# Altium PCB LXF1768.PcbDoc (part 2 of 5)
Units mil, origin at the board's own origin, x right, y up, seen from the top; angles counter-clockwise.
Board outline 3899 x 3079 mil, 2 copper layers (Top Layer, Bottom Layer); 52 components, 108 nets, 388 pads, 52 vias.
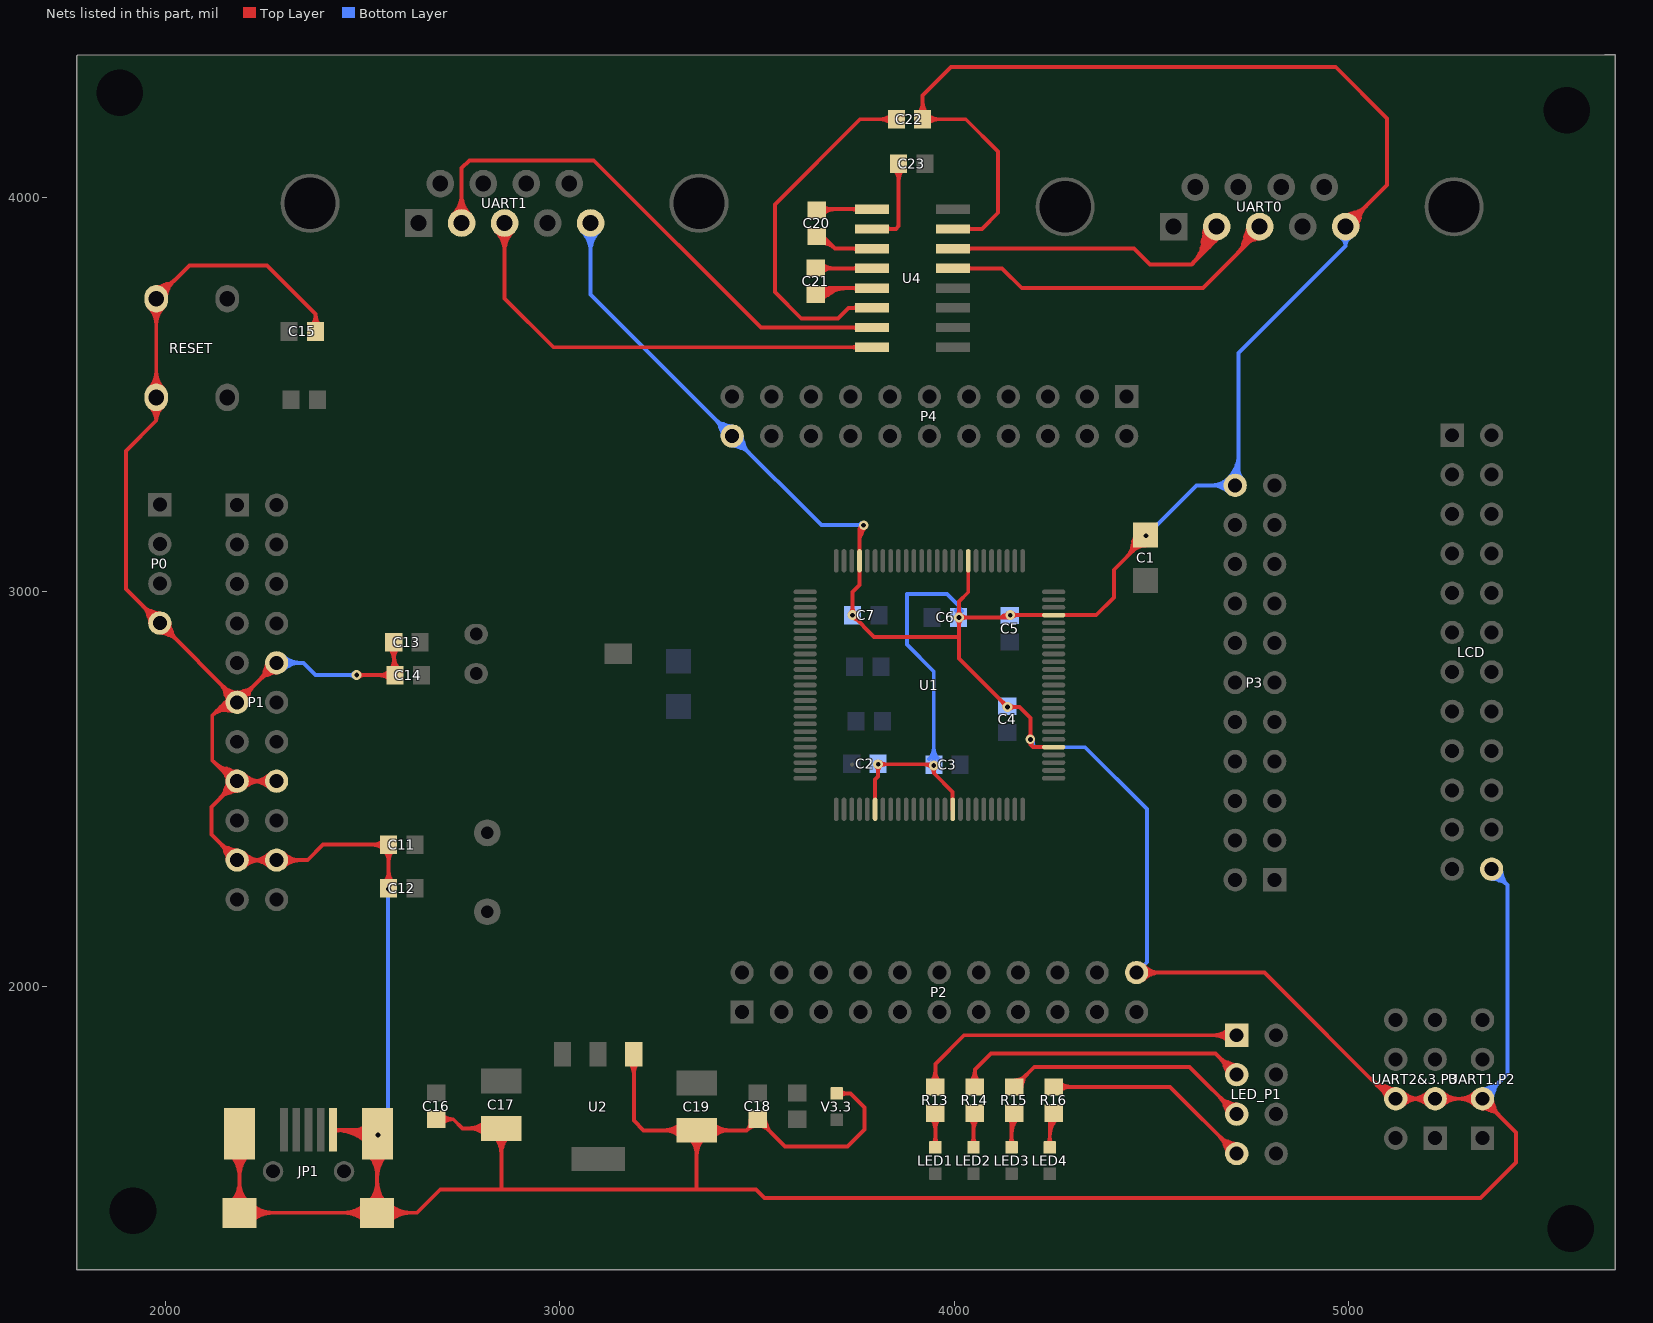
[diagram p2: the nets of this part, all layers, seen from the top]

## Via types
v1: diameter 25, hole 12, Top Layer to Bottom Layer, 27 vias
v2: diameter 24, hole 12, Top Layer to Bottom Layer, 25 vias

## Nets (pads, with @x,y where several pads share a name; then routed paths per layer and width w, separated by ;. In a path a pad name is that pad's centre, name@x,y a point inside that pad or via, vN(x,y) a via of type N, cw(c..) or ccw(c..) an arc to the next point about the centre after c; other vN are vias at no path point) (continued)
DGND: C1.2 C2.2 C3.2 C4.2 C5.2 C6.2 C7.2 C11.1 C12.1 C13.1 C14.1 C15.2 C16.2 C17.2 C18.2 C19.2 C22.2 JP1.5 JP1.6 JP1.7 JP1.8 JP1.9 LCD.24 P0.4 P1.10 P1.11 P1.15 P1.16 P1.19 P1.20 P2.22 P3.22 P4.22 pad.EndPad@4992,3926 pad.StartPad@3759.8,3078.74 RESET.2 U1.31 U1.41 U1.55 U1.72 U1.83 U1.97 U2.1 U4.15 UART0.5 UART1.5 UART1.P2.2 UART2&3.P3.3 UART2&3.P3.4 V3.3.2 | length 41208.9
  Top Layer w10: 1955.48,2943.35 ccw(c1992.61,2953.3) P0.4@1984.9,2915.64 ; 1963.65,2951.52 cw(c1953.7,2914.39) P0.4@1991.36,2922.1 ; RESET.2@1972.18,3749.33 cw(c2014.35,3737.73) 2003.03,3779.98 ; RESET.2@1977.64,3743.04 ccw(c1973.08,3778.61) 2007.72,3769.33 ; P0.4@1980.64,2919.9 ccw(c2018.3,2927.61) 2008.35,2890.48 ; RESET.2@1981.99,3747.77 cw(c2004.92,3746.72) 1998.98,3768.89 ; P0.4@1987.1,2926.36 cw(c1979.39,2888.7) 2016.52,2898.65 ; 2136.96,2556.6 cw(c2121.61,2499.3) P1.15@2177.72,2518.53 ; 2148.8,2700.71 ccw(c2152.36,2726.22) P1.11@2177.57,2720.93 ; 2150.87,2744.63 ccw(c2191.84,2755.6) P1.11@2180.54,2714.73 ; 2151.48,2342.35 ccw(c2188.61,2352.3) P1.19@2180.9,2314.64 ; 2151.48,2497.65 cw(c2188.61,2487.7) P1.15@2180.9,2525.36 ; 2152.71,2537.79 ccw(c2183.05,2545.92) P1.15@2181.78,2514.53 ; 2155.09,2551.74 cw(c2143.01,2506.64) P1.15@2187.18,2521.77 ; 2158.33,2540.87 cw(c2151.54,2515.5) P1.15@2177.52,2519.34 ; 2159.4,2699.23 ccw(c2162.86,2724.02) P1.11@2187.36,2718.88 ; 2159.65,2350.52 cw(c2149.7,2313.39) P1.19@2187.36,2321.1 ; 2159.65,2489.48 ccw(c2149.7,2526.61) P1.15@2187.36,2518.9 ; 2161.93,2749.9 cw(c2152.93,2716.32) P1.11@2187.43,2720.69 ; P1.11@2176.64,2721.1 cw(c2214.3,2713.39) 2204.35,2750.52 ; P1.11@2183.1,2714.64 ccw(c2175.39,2752.3) 2212.52,2742.35 ; JP1.6@2188,1626 JP1.8@2188,1426 JP1.9@2537,1426 ; 2251.48,2797.65 cw(c2288.61,2787.7) P1.10@2280.9,2825.36 ; 2259.65,2789.48 ccw(c2249.7,2826.61) P1.10@2287.36,2818.9 ; P1.16@2282,2520 P1.15@2182,2520 P1.15@2177,2515 ; P1.10@2282,2820 P1.11@2182,2720 ; C15.2@2380.93,3660 2380.93,3704.07 2258,3827 2061,3827 RESET.2@1977,3743 RESET.2@1977,3493 1977,3434 ; JP1.5@2425,1636 JP1.7@2526,1636 ; v1(2485,2789) C14.1@2582,2789 ; JP1.7@2537,1623 JP1.9@2537,1426 ; C12.1@2566,2249 C11.1@2566,2359 2400,2359 2361,2320 P1.20@2282,2320 P1.19@2182,2320 2117,2385 2117,2455 P1.15@2177,2515 ; C14.1@2579,2792 C13.1@2579,2872 ; C16.2@2687,1663.07 2729.93,1663.07 2753,1640 C17.2@2852,1640 2852,1489 ; U2.1@3187.55,1827.87 3187.55,1659.45 3212,1635 C19.2@3347,1635 ; 3347,1486 C19.2@3347,1635 ; C18.2@3504.77,1666.32 cw(c3498.06,1639.15) C18.2@3525.09,1646.4 ; V3.3.2@3703,1728.46 3736.54,1728.46 3772,1693 3772,1637 3729,1594 3571.07,1594 C18.2@3502,1663.07 3473.93,1635 ; v1@3742.06,2933.5 cw(c3742.2,2915.88) 3754.81,2928.19 ; v1@3742.19,2933.5 cw(c3742.61,2916.88) 3754.51,2928.5 cw(c3766.12,2940.39) v1@3749.5,2940.81 ; v1@3749.5,2940.94 ccw(c3767.12,2940.8) 3754.81,2928.19 ; 3759.9,3157.3 cw(c3768.21,3152.5) v2@3769.24,3162.04 ; 3763.51,3144.24 ccw(c3744.43,3155.25) v2@3763.83,3165.68 ; v2(3770,3169) 3759.8,3158.8 ; U1.31@3799.16,2448.82 3799.16,2524.16 3807,2532 v1(3807,2563) 3945,2563 v1(3948,2560) 3948,2541 3996.01,2492.99 U1.41@3996.01,2448.82 ; U4.15@3996.36,3920 4070,3920 4111,3961 4111,4116 4029,4198 C22.2@3919.93,4198 3919.93,4257.93 3992,4330 4967,4330 5097,4200 5097,4031 UART0.5@4992,3926 ; U1.83@4035.39,3078.74 4035.39,2999 4012,2975.61 v1(4012,2935) ; 4123.02,2938.41 cw(c4128.29,2929.28) v1@4136.3,2936.13 ; v1@4127.5,2708.06 ccw(c4109.88,2708.2) 4122.19,2720.81 ; v1@4127.5,2708.19 ccw(c4110.88,2708.61) 4122.5,2720.51 ccw(c4134.39,2732.12) v1@4134.81,2715.5 ; v1@4134.94,2715.5 cw(c4134.8,2733.12) 4122.19,2720.81 ; U1.55@4251.92,2606.3 4199.7,2606.3 ; 4449.93,3112 cw(c4498.94,3098.87) C1.2@4483.97,3147.35 ; 4452.59,3127.43 cw(c4472.95,3110.89) C1.2@4483.1,3135.08 ; C1.2@4454.62,3129.49 cw(c4492.63,3119.3) C1.2@4481.01,3156.9 ; C1.2@4461.01,3137.79 cw(c4478.34,3123.72) C1.2@4486.97,3144.31 ; 4461.19,3111.12 ccw(c4451.61,3146.88) C1.2@4488.49,3143.7 ; P2.22@4462,2035 4786,2035 5106,1715 UART2&3.P3.4@5119,1715 UART2&3.P3.3@5219,1715 UART1.P2.2@5339,1715 5424,1630 5424,1553 5334,1463 3519,1463 3497,1485 2697,1485 2638,1426 JP1.9@2537,1426 ; C1.2@4464.02,3134.8 cw(c4473.74,3119.34) C1.2@4482.43,3135.4 ; C1.2@4469.43,3148.16 cw(c4483.72,3136.55) C1.2@4490.83,3153.53 ; C1.2@4480.68,3136.71 cw(c4474.55,3130.62) C1.2@4482.68,3127.67 ; C1.2@4482.93,3128.38 cw(c4494.3,3124.26) C1.2@4489.18,3135.21 ; C1.2@4485,3144 4485,3136 4405,3056 4405,2986 4359.94,2940.95 U1.72@4251.92,2940.95 4251.86,2941 v1(4142,2941) 4136,2935 v1(4012,2935) ; UART0.5@4982.2,3928.01 cw(c5025.64,3919.11) 5014.16,3961.94 ; UART0.5@4994.01,3916.2 ccw(c4985.11,3959.64) 5027.94,3948.16 ; 5029.8,3966.13 ccw(c5043.37,3915.48) UART0.5@4992,3926 ; 5032.13,3963.8 cw(c4981.48,3977.37) UART0.5@4992,3926 ; 5071.84,1752.16 cw(c5055.4,1690.81) UART2&3.P3.4@5114.77,1713.39 ; 5090.07,1731.42 ccw(c5118.61,1739.06) UART2&3.P3.4@5119.09,1709.53 ; 5090.72,1747.1 cw(c5077.94,1699.38) UART2&3.P3.4@5124.12,1716.95 ; 5093.59,1736.34 cw(c5086.06,1708.22) UART2&3.P3.4@5114.57,1714.09 ; UART1.P2.2@5333.64,1713.9 ccw(c5371.3,1721.61) 5361.35,1684.48 ; UART1.P2.2@5340.1,1720.36 cw(c5332.39,1682.7) 5369.52,1692.65 ; 1944.13,2962.87 cw(c1902.26,2921) 1961.47,2921 ccw(c1902.26,2921) 1944.13,2962.87 ; 1944.13,2962.87 ccw(c1986,3004.74) 1986,2945.53 cw(c1986,3004.74) 1944.13,2962.87 ; 1961.2,2945.8 cw(c1936.4,2921) 1971.47,2921 ccw(c1936.4,2921) 1961.2,2945.8 ; 1961.2,2945.8 ccw(c1986,2970.6) 1986,2935.53 cw(c1986,2970.6) 1961.2,2945.8 ; 1977,3434 cw(c2022.81,3434) 1993.17,3468.94 ccw(c2022.81,3434) 1977,3434 ; 1977,3434 ccw(c1931.19,3434) 1960.83,3468.94 cw(c1931.19,3434) 1977,3434 ; 1977,3434 1900,3357 1900,3007 P0.4@1986,2921 2182,2725 P1.11@2182,2720 ; 1977,3455.6 cw(c2004.49,3455.6) 1986.7,3476.56 ccw(c2004.49,3455.6) 1977,3455.6 ; 1977,3455.6 ccw(c1949.51,3455.6) 1967.3,3476.56 cw(c1949.51,3455.6) 1977,3455.6 ; 1977,3534.21 cw(c1940.79,3534.21) 1966.39,3508.61 ccw(c1940.79,3534.21) 1977,3534.21 ; 1977,3534.21 ccw(c2013.21,3534.21) 1987.61,3508.61 cw(c2013.21,3534.21) 1977,3534.21 ; 1977,3558.36 cw(c1916.64,3558.36) 1959.32,3515.68 ccw(c1916.64,3558.36) 1977,3558.36 ; 1977,3558.36 ccw(c2037.36,3558.36) 1994.68,3515.68 cw(c2037.36,3558.36) 1977,3558.36 ; 1977,3677.64 cw(c2037.36,3677.64) 1994.68,3720.32 ccw(c2037.36,3677.64) 1977,3677.64 ; 1977,3677.64 ccw(c1916.64,3677.64) 1959.32,3720.32 cw(c1916.64,3677.64) 1977,3677.64 ; 1977,3701.79 cw(c2013.21,3701.79) 1987.61,3727.39 ccw(c2013.21,3701.79) 1977,3701.79 ; 1977,3701.79 ccw(c1940.79,3701.79) 1966.39,3727.39 cw(c1940.79,3701.79) 1977,3701.79 ; 2010.8,2896.2 cw(c2035.6,2921) 2000.53,2921 ccw(c2035.6,2921) 2010.8,2896.2 ; 2010.8,2896.2 ccw(c1986,2871.4) 1986,2906.47 cw(c1986,2871.4) 2010.8,2896.2 ; 2027.87,2879.13 cw(c2069.74,2921) 2010.53,2921 ccw(c2069.74,2921) 2027.87,2879.13 ; 2027.87,2879.13 ccw(c1986,2837.26) 1986,2896.47 cw(c1986,2837.26) 2027.87,2879.13 ; 2119,2687 cw(c2153.45,2652.56) 2172.44,2697.41 ccw(c2153.45,2652.56) 2119,2687 ; 2119,2687 2152,2720 ; 2119,2687 2119,2573 P1.15@2177,2515 ; 2140.13,2361.87 cw(c2098.26,2320) 2157.47,2320 ccw(c2098.26,2320) 2140.13,2361.87 ; 2140.13,2361.87 ccw(c2182,2403.74) 2182,2344.53 cw(c2182,2403.74) 2140.13,2361.87 ; 2140.13,2478.13 cw(c2182,2436.26) 2182,2495.47 ccw(c2182,2436.26) 2140.13,2478.13 ; 2140.13,2478.13 ccw(c2098.26,2520) P1.15@2157.47,2520 ; 2140.13,2478.13 ccw(c2098.26,2520) P1.15@2157.47,2520 ; 2152,2720 cw(c2152,2713.92) 2157.96,2715.13 ccw(c2152,2713.92) 2152,2720 ; 2152,2720 ccw(c2152,2726.08) 2157.96,2724.87 cw(c2152,2726.08) 2152,2720 ; 2152,2720 P1.11@2182,2720 ; 2157.2,2344.8 cw(c2132.4,2320) 2167.47,2320 ccw(c2132.4,2320) 2157.2,2344.8 ; 2157.2,2344.8 ccw(c2182,2369.6) 2182,2334.53 cw(c2182,2369.6) 2157.2,2344.8 ; 2157.2,2495.2 cw(c2182,2470.4) 2182,2505.47 ccw(c2182,2470.4) 2157.2,2495.2 ; 2157.2,2495.2 ccw(c2132.4,2520) 2167.47,2520 cw(c2132.4,2520) 2157.2,2495.2 ; P1.15@2157.47,2520 ccw(c2122.4,2520) 2147.2,2544.8 cw(c2122.4,2520) P1.15@2157.47,2520 ; P1.11@2182,2744.53 ccw(c2182,2803.74) 2223.87,2761.87 ; P1.11@2182,2744.53 cw(c2182,2791.67) 2148.66,2758.34 ccw(c2182,2791.67) P1.11@2182,2744.53 ; P1.11@2182,2744.53 ccw(c2182,2803.74) 2223.87,2761.87 ; 2188,1481.53 cw(c2132.47,1481.53) 2171.74,1442.26 ccw(c2132.47,1481.53) 2188,1481.53 ; 2188,1481.53 ccw(c2243.53,1481.53) 2204.26,1442.26 cw(c2243.53,1481.53) 2188,1481.53 ; 2188,1505.67 cw(c2108.33,1505.67) 2164.67,1449.33 ccw(c2108.33,1505.67) 2188,1505.67 ; 2188,1505.67 ccw(c2267.67,1505.67) 2211.33,1449.33 cw(c2267.67,1505.67) 2188,1505.67 ; 2188,1517.21 cw(c2271.29,1517.21) 2212.4,1576.1 ccw(c2271.29,1517.21) 2188,1517.21 ; 2188,1517.21 ccw(c2104.71,1517.21) 2163.6,1576.1 cw(c2104.71,1517.21) 2188,1517.21 ; 2188,1541.35 cw(c2247.15,1541.35) 2205.32,1583.18 ccw(c2247.15,1541.35) 2188,1541.35 ; 2188,1541.35 ccw(c2128.85,1541.35) 2170.68,1583.18 cw(c2128.85,1541.35) 2188,1541.35 ; 2206.8,2744.8 cw(c2182,2769.6) 2182,2734.53 ccw(c2182,2769.6) 2206.8,2744.8 ; 2206.8,2744.8 ccw(c2231.6,2720) 2196.53,2720 cw(c2231.6,2720) 2206.8,2744.8 ; 2217.07,2320 cw(c2217.07,2355.07) 2192.27,2330.27 ccw(c2217.07,2355.07) 2217.07,2320 ; 2217.07,2320 ccw(c2217.07,2284.93) 2192.27,2309.73 cw(c2217.07,2284.93) 2217.07,2320 ; 2217.07,2520 cw(c2217.07,2555.07) 2192.27,2530.27 ccw(c2217.07,2555.07) 2217.07,2520 ; 2217.07,2520 ccw(c2217.07,2484.93) 2192.27,2509.73 cw(c2217.07,2484.93) 2217.07,2520 ; 2222.79,2320 cw(c2222.79,2260.79) 2264.66,2302.66 ccw(c2222.79,2260.79) 2222.79,2320 ; 2222.79,2320 ccw(c2222.79,2379.21) 2264.66,2337.34 cw(c2222.79,2379.21) 2222.79,2320 ; 2222.79,2520 cw(c2222.79,2460.79) 2264.66,2502.66 ccw(c2222.79,2460.79) 2222.79,2520 ; 2222.79,2520 ccw(c2222.79,2579.21) 2264.66,2537.34 cw(c2222.79,2579.21) 2222.79,2520 ; 2223.87,2761.87 ccw(c2265.74,2720) 2206.53,2720 cw(c2265.74,2720) 2223.87,2761.87 ; 2240.13,2778.13 cw(c2282,2736.26) 2282,2795.47 ccw(c2282,2736.26) 2240.13,2778.13 ; 2240.13,2778.13 ccw(c2198.26,2820) 2257.47,2820 cw(c2198.26,2820) 2240.13,2778.13 ; 2241.21,2320 cw(c2241.21,2379.21) 2199.34,2337.34 ccw(c2241.21,2379.21) 2241.21,2320 ; 2241.21,2320 ccw(c2241.21,2260.79) 2199.34,2302.66 cw(c2241.21,2260.79) 2241.21,2320 ; 2241.21,2520 cw(c2241.21,2579.21) 2199.34,2537.34 ccw(c2241.21,2579.21) 2241.21,2520 ; 2241.21,2520 ccw(c2241.21,2460.79) 2199.34,2502.66 cw(c2241.21,2460.79) 2241.21,2520 ; 2246.93,2320 cw(c2246.93,2284.93) 2271.73,2309.73 ccw(c2246.93,2284.93) 2246.93,2320 ; 2246.93,2320 ccw(c2246.93,2355.07) 2271.73,2330.27 cw(c2246.93,2355.07) 2246.93,2320 ; 2246.93,2520 cw(c2246.93,2484.93) 2271.73,2509.73 ccw(c2246.93,2484.93) 2246.93,2520 ; 2246.93,2520 ccw(c2246.93,2555.07) 2271.73,2530.27 cw(c2246.93,2555.07) 2246.93,2520 ; 2248.53,1426 cw(c2248.53,1481.53) 2209.26,1442.26 ccw(c2248.53,1481.53) 2248.53,1426 ; 2248.53,1426 ccw(c2248.53,1370.47) 2209.26,1409.74 cw(c2248.53,1370.47) 2248.53,1426 ; 2257.2,2795.2 cw(c2282,2770.4) 2282,2805.47 ccw(c2282,2770.4) 2257.2,2795.2 ; 2257.2,2795.2 ccw(c2232.4,2820) 2267.47,2820 cw(c2232.4,2820) 2257.2,2795.2 ; 2272.67,1426 cw(c2272.67,1505.67) 2216.33,1449.33 ccw(c2272.67,1505.67) 2272.67,1426 ; 2272.67,1426 ccw(c2272.67,1346.33) 2216.33,1402.67 cw(c2272.67,1346.33) 2272.67,1426 ; 2317.07,2320 cw(c2317.07,2355.07) 2292.27,2330.27 ccw(c2317.07,2355.07) 2317.07,2320 ; 2317.07,2320 ccw(c2317.07,2284.93) 2292.27,2309.73 cw(c2317.07,2284.93) 2317.07,2320 ; 2341.21,2320 cw(c2341.21,2379.21) 2299.34,2337.34 ccw(c2341.21,2379.21) 2341.21,2320 ; 2341.21,2320 ccw(c2341.21,2260.79) 2299.34,2302.66 cw(c2341.21,2260.79) 2341.21,2320 ; 2380.93,3702.17 cw(c2340.72,3702.17) 2369.15,3673.74 ccw(c2340.72,3702.17) 2380.93,3702.17 ; 2380.93,3702.17 ccw(c2421.13,3702.17) 2392.7,3673.74 cw(c2421.13,3702.17) 2380.93,3702.17 ; JP1.5@2427.98,1631.98 cw(c2436.83,1620.05) 2439.01,1634.75 ; JP1.5@2427.98,1631.98 cw(c2436.83,1620.05) 2439.01,1634.75 ; JP1.5@2427.98,1631.98 cw(c2436.83,1620.05) 2439.01,1634.75 ; JP1.5@2429.02,1638.98 ccw(c2436.47,1644.51) 2435.11,1635.33 ; JP1.5@2429.02,1638.98 ccw(c2436.47,1644.51) 2435.11,1635.33 ; JP1.5@2429.02,1638.98 ccw(c2436.47,1644.51) 2435.11,1635.33 ; 2437.07,1636 cw(c2437.07,1648.07) 2428.54,1639.54 ccw(c2437.07,1648.07) 2437.07,1636 ; 2437.07,1636 ccw(c2437.07,1623.93) 2428.54,1632.46 cw(c2437.07,1623.93) 2437.07,1636 ; 2452.33,1426 cw(c2452.33,1346.33) 2508.67,1402.67 ccw(c2452.33,1346.33) 2452.33,1426 ; 2452.33,1426 ccw(c2452.33,1505.67) 2508.67,1449.33 cw(c2452.33,1505.67) 2452.33,1426 ; 2476.47,1426 cw(c2476.47,1370.47) 2515.74,1409.74 ccw(c2476.47,1370.47) 2476.47,1426 ; 2476.47,1426 ccw(c2476.47,1481.53) 2515.74,1442.26 cw(c2476.47,1481.53) 2476.47,1426 ; 2478.85,1636 cw(c2478.85,1566.85) 2527.75,1615.75 ccw(c2478.85,1566.85) 2478.85,1636 ; 2478.85,1636 ccw(c2478.85,1685.15) 2513.6,1650.4 cw(c2478.85,1685.15) 2478.85,1636 ; 2503.11,2789 cw(c2503.11,2807.11) 2490.3,2794.3 ccw(c2503.11,2807.11) 2503.11,2789 ; 2503.11,2789 ccw(c2503.11,2770.89) 2490.3,2783.7 cw(c2503.11,2770.89) 2503.11,2789 ; JP1.7@2505.88,1629.27 ccw(c2520.38,1652.71) JP1.7@2535.02,1629.35 ; JP1.7@2505.88,1629.27 ccw(c2520.38,1652.71) JP1.7@2535.02,1629.35 ; JP1.7@2505.88,1629.27 ccw(c2520.38,1652.71) JP1.7@2535.02,1629.35 ; JP1.7@2519.55,1620.82 ccw(c2529.89,1637.54) JP1.7@2540.33,1620.88 ; JP1.7@2519.55,1620.82 ccw(c2529.89,1637.54) JP1.7@2540.33,1620.88 ; JP1.7@2519.55,1620.82 ccw(c2529.89,1637.54) JP1.7@2540.33,1620.88 ; 2525.79,2359 cw(c2525.79,2318.79) 2554.22,2347.22 ccw(c2525.79,2318.79) 2525.79,2359 ; 2525.79,2359 ccw(c2525.79,2399.21) 2554.22,2370.78 cw(c2525.79,2399.21) 2525.79,2359 ; 2537,1481.53 cw(c2481.47,1481.53) 2520.74,1442.26 ccw(c2481.47,1481.53) 2537,1481.53 ; 2537,1481.53 ccw(c2592.53,1481.53) 2553.26,1442.26 cw(c2592.53,1481.53) 2537,1481.53 ; 2537,1505.67 cw(c2457.33,1505.67) 2513.67,1449.33 ccw(c2457.33,1505.67) 2537,1505.67 ; 2537,1505.67 ccw(c2616.67,1505.67) 2560.33,1449.33 cw(c2616.67,1505.67) 2537,1505.67 ; 2541.79,2789 cw(c2541.79,2748.79) 2570.22,2777.22 ccw(c2541.79,2748.79) 2541.79,2789 ; 2541.79,2789 ccw(c2541.79,2829.21) 2570.22,2800.78 cw(c2541.79,2829.21) 2541.79,2789 ; 2566,2291.17 cw(c2525.79,2291.17) 2554.22,2262.74 ccw(c2525.79,2291.17) 2566,2291.17 ; 2566,2291.17 ccw(c2606.21,2291.17) 2577.78,2262.74 cw(c2606.21,2291.17) 2566,2291.17 ; 2566,2316.83 cw(c2606.21,2316.83) 2577.78,2345.26 ccw(c2606.21,2316.83) 2566,2316.83 ; 2566,2316.83 ccw(c2525.79,2316.83) 2554.22,2345.26 cw(c2525.79,2316.83) 2566,2316.83 ; 2579,2829.83 cw(c2619.21,2829.83) 2590.78,2858.26 ccw(c2619.21,2829.83) 2579,2829.83 ; 2579,2829.83 ccw(c2538.79,2829.83) 2567.22,2858.26 cw(c2538.79,2829.83) 2579,2829.83 ; 2597.53,1426 cw(c2597.53,1481.53) 2558.26,1442.26 ccw(c2597.53,1481.53) 2597.53,1426 ; 2597.53,1426 ccw(c2597.53,1370.47) 2558.26,1409.74 cw(c2597.53,1370.47) 2597.53,1426 ; 2621.67,1426 cw(c2621.67,1505.67) 2565.33,1449.33 ccw(c2621.67,1505.67) 2621.67,1426 ; 2621.67,1426 ccw(c2621.67,1346.33) 2565.33,1402.67 cw(c2621.67,1346.33) 2621.67,1426 ; 2729.17,1663.07 cw(c2729.17,1703.28) 2700.74,1674.85 ccw(c2729.17,1703.28) 2729.17,1663.07 ; 2729.17,1663.07 ccw(c2729.17,1622.87) 2700.74,1651.3 cw(c2729.17,1622.87) 2729.17,1663.07 ; 2768.35,1640 cw(c2768.35,1576.03) 2813.58,1621.26 ccw(c2768.35,1576.03) 2768.35,1640 ; 2768.35,1640 ccw(c2768.35,1703.97) 2813.58,1658.74 cw(c2768.35,1703.97) 2768.35,1640 ; 2792.49,1640 cw(c2792.49,1600.18) 2820.65,1628.34 ccw(c2792.49,1600.18) 2792.49,1640 ; 2792.49,1640 ccw(c2792.49,1679.82) 2820.65,1651.66 cw(c2792.49,1679.82) 2792.49,1640 ; 2852,1576.03 cw(c2915.97,1576.03) 2870.74,1621.26 ccw(c2915.97,1576.03) 2852,1576.03 ; 2852,1576.03 ccw(c2788.03,1576.03) 2833.26,1621.26 cw(c2788.03,1576.03) 2852,1576.03 ; 2852,1600.18 cw(c2891.82,1600.18) 2863.66,1628.34 ccw(c2891.82,1600.18) 2852,1600.18 ; 2852,1600.18 ccw(c2812.18,1600.18) 2840.34,1628.34 cw(c2812.18,1600.18) 2852,1600.18 ; 3187.55,1778.81 cw(c3227.76,1778.81) 3199.33,1807.24 ccw(c3227.76,1778.81) 3187.55,1778.81 ; 3187.55,1778.81 ccw(c3147.34,1778.81) 3175.77,1807.24 cw(c3147.34,1778.81) 3187.55,1778.81 ; 3263.35,1635 cw(c3263.35,1571.03) 3308.58,1616.26 ccw(c3263.35,1571.03) 3263.35,1635 ; 3263.35,1635 ccw(c3263.35,1698.97) 3308.58,1653.74 cw(c3263.35,1698.97) 3263.35,1635 ; 3287.49,1635 cw(c3287.49,1595.18) 3315.65,1623.34 ccw(c3287.49,1595.18) 3287.49,1635 ; 3287.49,1635 ccw(c3287.49,1674.82) 3315.65,1646.66 cw(c3287.49,1674.82) 3287.49,1635 ; 3347,1571.03 cw(c3410.97,1571.03) 3365.74,1616.26 ccw(c3410.97,1571.03) 3347,1571.03 ; 3347,1571.03 ccw(c3283.03,1571.03) 3328.26,1616.26 cw(c3283.03,1571.03) 3347,1571.03 ; 3347,1595.18 cw(c3386.82,1595.18) 3358.66,1623.34 ccw(c3386.82,1595.18) 3347,1595.18 ; 3347,1595.18 ccw(c3307.18,1595.18) 3335.34,1623.34 cw(c3307.18,1595.18) 3347,1595.18 ; C19.2@3347,1635 3473.93,1635 ; 3406.51,1635 cw(c3406.51,1674.82) 3378.35,1646.66 ccw(c3406.51,1674.82) 3406.51,1635 ; 3406.51,1635 ccw(c3406.51,1595.18) 3378.35,1623.34 cw(c3406.51,1595.18) 3406.51,1635 ; 3430.65,1635 cw(c3430.65,1698.97) 3385.42,1653.74 ccw(c3430.65,1698.97) 3430.65,1635 ; 3430.65,1635 ccw(c3430.65,1571.03) 3385.42,1616.26 cw(c3430.65,1571.03) 3430.65,1635 ; 3473.93,1635 ccw(c3450.58,1658.35) 3483.45,1661.49 cw(c3450.58,1658.35) 3473.93,1635 ; 3727.95,1728.46 cw(c3727.95,1754.41) 3709.6,1736.06 ccw(c3727.95,1754.41) 3727.95,1728.46 ; 3727.95,1728.46 ccw(c3727.95,1702.52) 3709.6,1720.86 cw(c3727.95,1702.52) 3727.95,1728.46 ; 3742,2959.11 cw(c3723.89,2959.11) 3736.7,2946.3 ccw(c3723.89,2959.11) 3742,2959.11 ; 3742,2959.11 ccw(c3760.11,2959.11) 3747.3,2946.3 cw(c3760.11,2959.11) 3742,2959.11 ; 3754.44,2928.56 cw(c3766.88,2940.71) 3749.5,2940.91 ccw(c3766.88,2940.71) 3754.44,2928.56 ; 3754.44,2928.56 ccw(c3742.29,2916.12) 3742.09,2933.5 cw(c3742.29,2916.12) 3754.44,2928.56 ; 3754.8,2928.2 cw(c3767.61,2941) 3749.5,2941 ccw(c3767.61,2941) 3754.8,2928.2 ; 3754.8,2928.2 ccw(c3742,2915.39) 3742,2933.5 cw(c3742,2915.39) 3754.8,2928.2 ; 3759.8,3158.8 cw(c3767.84,3150.75) 3769.18,3162.05 ccw(c3767.84,3150.75) 3759.8,3158.8 ; 3759.8,3158.8 ccw(c3751.75,3166.84) 3763.05,3168.18 cw(c3751.75,3166.84) 3759.8,3158.8 ; 3759.8,3158.8 pad.StartPad@3759.8,3078.74 3759.8,3017.8 3742,3000 v1(3742,2941) 3797,2886 4011,2886 4012,2887 ; 3807,2544.89 cw(c3825.11,2544.89) v1@3812.3,2557.7 ; 3807,2544.89 ccw(c3788.89,2544.89) 3801.7,2557.7 cw(c3788.89,2544.89) 3807,2544.89 ; 3807,2544.89 cw(c3825.11,2544.89) v1@3812.3,2557.7 ; v1@3812.3,2557.7 cw(c3825.11,2544.89) 3825.11,2563 ; v1@3812.3,2557.7 cw(c3825.11,2544.89) 3825.11,2563 ; 3825.11,2563 cw(c3825.11,2581.11) 3812.3,2568.3 ccw(c3825.11,2581.11) 3825.11,2563 ; 3919.93,4240.17 cw(c3879.72,4240.17) 3908.15,4211.74 ccw(c3879.72,4240.17) 3919.93,4240.17 ; 3919.93,4240.17 ccw(c3960.13,4240.17) 3931.7,4211.74 cw(c3960.13,4240.17) 3919.93,4240.17 ; v1@3942.7,2554.7 ccw(c3922.65,2534.65) 3922.65,2563 cw(c3922.65,2534.65) v1@3942.7,2554.7 ; v1@3942.7,2554.7 cw(c3929.89,2541.89) 3948,2541.89 ; v1@3942.7,2554.7 cw(c3929.89,2541.89) 3948,2541.89 ; 3948,2541.89 cw(c3966.11,2541.89) 3953.3,2554.7 ccw(c3966.11,2541.89) 3948,2541.89 ; 3960.13,4198 cw(c3960.13,4238.21) 3931.7,4209.78 ccw(c3960.13,4238.21) 3960.13,4198 ; 3960.13,4198 ccw(c3960.13,4157.79) 3931.7,4186.22 cw(c3960.13,4157.79) 3960.13,4198 ; 4012,2887 4012,2831 v1(4135,2708) 4165,2708 4193,2680 v2(4193,2626) 4193,2613 ; 4012,2887 v1(4012,2935) ; 4012,2916.89 cw(c4030.11,2916.89) v1@4017.3,2929.7 ; 4012,2916.89 ccw(c3993.89,2916.89) 4006.7,2929.7 cw(c3993.89,2916.89) 4012,2916.89 ; 4012,2916.89 cw(c4030.11,2916.89) v1@4017.3,2929.7 ; 4012,2953.11 cw(c3993.89,2953.11) 4006.7,2940.3 ccw(c3993.89,2953.11) 4012,2953.11 ; 4012,2953.11 ccw(c4030.11,2953.11) v1@4017.3,2940.3 ; 4012,2953.11 ccw(c4030.11,2953.11) v1@4017.3,2940.3 ; v1@4017.3,2929.7 cw(c4030.11,2916.89) 4030.11,2935 ; v1@4017.3,2929.7 cw(c4030.11,2916.89) 4030.11,2935 ; v1@4017.3,2940.3 ccw(c4030.11,2953.11) 4030.11,2935 ; v1@4017.3,2940.3 ccw(c4030.11,2953.11) 4030.11,2935 ; 4044.3,3920 cw(c4044.3,3936.44) 4032.67,3924.82 ccw(c4044.3,3936.44) 4044.3,3920 ; 4044.3,3920 ccw(c4044.3,3903.56) 4032.67,3915.18 cw(c4044.3,3903.56) 4044.3,3920 ; 4122.2,2720.8 cw(c4109.39,2708) 4127.5,2708 ccw(c4109.39,2708) 4122.2,2720.8 ; 4122.2,2720.8 ccw(c4135,2733.61) 4135,2715.5 cw(c4135,2733.61) 4122.2,2720.8 ; 4122.56,2720.44 cw(c4110.12,2708.29) 4127.5,2708.09 ccw(c4110.12,2708.29) 4122.56,2720.44 ; 4122.56,2720.44 ccw(c4134.71,2732.88) 4134.91,2715.5 cw(c4134.71,2732.88) 4122.56,2720.44 ; 4153.11,2708 cw(c4153.11,2726.11) 4140.3,2713.3 ccw(c4153.11,2726.11) 4153.11,2708 ; 4153.11,2708 ccw(c4153.11,2689.89) 4140.3,2702.7 cw(c4153.11,2689.89) 4153.11,2708 ; 4160.11,2941 cw(c4160.11,2959.11) 4147.3,2946.3 ccw(c4160.11,2959.11) 4160.11,2941 ; 4160.11,2941 ccw(c4160.11,2922.89) 4147.3,2935.7 cw(c4160.11,2922.89) 4160.11,2941 ; 4193,2613 cw(c4201.57,2613) 4196.85,2620.16 ccw(c4201.57,2613) 4193,2613 ; 4193,2613 ccw(c4184.43,2613) 4189.15,2620.16 cw(c4184.43,2613) 4193,2613 ; 4193,2613 4199.7,2606.3 ; 4193,2642.9 cw(c4176.1,2642.9) 4188.05,2630.95 ccw(c4176.1,2642.9) 4193,2642.9 ; 4193,2642.9 ccw(c4209.9,2642.9) 4197.95,2630.95 cw(c4209.9,2642.9) 4193,2642.9 ; 4199.7,2606.3 cw(c4208.08,2614.68) 4198.6,2621.8 ccw(c4208.08,2614.68) 4199.7,2606.3 ; 4497.07,2035 cw(c4497.07,2070.07) 4472.27,2045.27 ccw(c4497.07,2070.07) 4497.07,2035 ; 4497.07,2035 ccw(c4497.07,1999.93) 4472.27,2024.73 cw(c4497.07,1999.93) 4497.07,2035 ; 4521.21,2035 cw(c4521.21,2094.21) 4479.34,2052.34 ccw(c4521.21,2094.21) 4521.21,2035 ; 4521.21,2035 ccw(c4521.21,1975.79) 4479.34,2017.66 cw(c4521.21,1975.79) 4521.21,2035 ; 5026.14,3960.14 cw(c4992,3994.28) 4992,3946 ccw(c4992,3994.28) 5026.14,3960.14 ; 5026.14,3960.14 ccw(c5060.28,3926) 5012,3926 cw(c5060.28,3926) 5026.14,3960.14 ; 5043.21,3977.21 cw(c4992,4028.43) 4992,3956 ccw(c4992,4028.43) 5043.21,3977.21 ; 5043.21,3977.21 ccw(c5094.43,3926) 5022,3926 cw(c5094.43,3926) 5043.21,3977.21 ; 5154.07,1715 cw(c5154.07,1750.07) 5129.27,1725.27 ccw(c5154.07,1750.07) 5154.07,1715 ; 5154.07,1715 ccw(c5154.07,1679.93) 5129.27,1704.73 cw(c5154.07,1679.93) 5154.07,1715 ; 5159.79,1715 cw(c5159.79,1655.79) 5201.66,1697.66 ccw(c5159.79,1655.79) 5159.79,1715 ; 5159.79,1715 ccw(c5159.79,1774.21) 5201.66,1732.34 cw(c5159.79,1774.21) 5159.79,1715 ; 5178.21,1715 cw(c5178.21,1774.21) 5136.34,1732.34 ccw(c5178.21,1774.21) 5178.21,1715 ; 5178.21,1715 ccw(c5178.21,1655.79) 5136.34,1697.66 cw(c5178.21,1655.79) 5178.21,1715 ; 5183.93,1715 cw(c5183.93,1679.93) 5208.73,1704.73 ccw(c5183.93,1679.93) 5183.93,1715 ; 5183.93,1715 ccw(c5183.93,1750.07) 5208.73,1725.27 cw(c5183.93,1750.07) 5183.93,1715 ; 5254.07,1715 cw(c5254.07,1750.07) 5229.27,1725.27 ccw(c5254.07,1750.07) 5254.07,1715 ; 5254.07,1715 ccw(c5254.07,1679.93) 5229.27,1704.73 cw(c5254.07,1679.93) 5254.07,1715 ; 5278.21,1715 cw(c5278.21,1774.21) 5236.34,1732.34 ccw(c5278.21,1774.21) 5278.21,1715 ; 5278.21,1715 ccw(c5278.21,1655.79) 5236.34,1697.66 cw(c5278.21,1655.79) 5278.21,1715 ; 5279.79,1715 cw(c5279.79,1655.79) 5321.66,1697.66 ccw(c5279.79,1655.79) 5279.79,1715 ; 5279.79,1715 ccw(c5279.79,1774.21) 5321.66,1732.34 cw(c5279.79,1774.21) 5279.79,1715 ; 5303.93,1715 cw(c5303.93,1679.93) 5328.73,1704.73 ccw(c5303.93,1679.93) 5303.93,1715 ; 5303.93,1715 ccw(c5303.93,1750.07) 5328.73,1725.27 cw(c5303.93,1750.07) 5303.93,1715 ; 5363.8,1690.2 cw(c5388.6,1715) 5353.53,1715 ccw(c5388.6,1715) 5363.8,1690.2 ; 5363.8,1690.2 ccw(c5339,1665.4) 5339,1700.47 cw(c5339,1665.4) 5363.8,1690.2 ; 5380.87,1673.13 cw(c5422.74,1715) 5363.53,1715 ccw(c5422.74,1715) 5380.87,1673.13 ; 5380.87,1673.13 ccw(c5339,1631.26) 5339,1690.47 cw(c5339,1631.26) 5380.87,1673.13 ; RESET.2@1977,3763 ccw(c1977,3811.28) 2011.14,3777.14 cw(c1977,3811.28) RESET.2@1977,3763 ; RESET.2@1977,3773 ccw(c1977,3845.43) 2028.21,3794.21 cw(c1977,3845.43) RESET.2@1977,3773 ; RESET.2@2002,3748 cw(c2050.28,3748) 2016.14,3782.14 ccw(c2050.28,3748) RESET.2@2002,3748 ; 2123.06,2568.94 ccw(c2182,2627.88) 2182,2544.53 cw(c2182,2627.88) 2123.06,2568.94 ; 2129.5,2697.5 cw(c2159.69,2667.3) 2176.34,2706.62 ccw(c2159.69,2667.3) 2129.5,2697.5 ; 2136.59,2770.41 cw(c2086.19,2720) 2157.47,2720 ccw(c2086.19,2720) 2136.59,2770.41 ; 2139.99,2707.99 cw(c2165.93,2682.05) 2180.23,2715.83 ccw(c2165.93,2682.05) 2139.99,2707.99 ; 2140.13,2551.87 ccw(c2182,2593.74) 2182,2534.53 cw(c2182,2593.74) 2140.13,2551.87 ; 2150.48,2718.48 cw(c2172.17,2696.79) 2184.13,2725.04 ccw(c2172.17,2696.79) 2150.48,2718.48 ; 2153.66,2753.34 cw(c2120.33,2720) 2167.47,2720 ccw(c2120.33,2720) 2153.66,2753.34 ; JP1.5@2430.57,1636 cw(c2430.57,1518.57) 2513.6,1601.6 ccw(c2430.57,1518.57) JP1.5@2430.57,1636 ; 2454.71,1636 cw(c2454.71,1542.71) 2520.68,1608.68 ccw(c2454.71,1542.71) 2454.71,1636 ; JP1.7@2513.6,1576.1 cw(c2457.12,1519.62) 2537,1519.62 ccw(c2457.12,1519.62) JP1.7@2513.6,1576.1 ; JP1.7@2520.68,1583.18 cw(c2481.27,1543.77) 2537,1543.77 ccw(c2481.27,1543.77) JP1.7@2520.68,1583.18 ; JP1.7@2533.7,1617.7 cw(c2525.72,1609.72) 2537,1609.72 ccw(c2525.72,1609.72) JP1.7@2533.7,1617.7 ; 2537,1514.8 cw(c2623.7,1514.8) 2562.4,1576.1 ccw(c2623.7,1514.8) 2537,1514.8 ; 2537,1538.94 cw(c2599.56,1538.94) 2555.32,1583.18 ccw(c2599.56,1538.94) 2537,1538.94 ; JP1.7@2537,1600.07 cw(c2561.93,1600.07) 2544.3,1617.7 ccw(c2561.93,1600.07) JP1.7@2537,1600.07 ; C12.1@2559.7,2252.3 ccw(c2544.48,2267.52) 2566,2267.52 cw(c2544.48,2267.52) C12.1@2559.7,2252.3 ; C12.1@2566,2262.69 ccw(c2580.69,2262.69) 2570.3,2252.3 cw(c2580.69,2262.69) C12.1@2566,2262.69 ; C14.1@2570.22,2802.74 ccw(c2549.04,2823.93) 2579,2823.93 cw(c2549.04,2823.93) C14.1@2570.22,2802.74 ; 2579,2814.27 ccw(c2605.31,2814.27) 2586.7,2795.67 cw(c2605.31,2814.27) 2579,2814.27 ; 2579,2838.42 ccw(c2629.45,2838.42) 2593.78,2802.74 cw(c2629.45,2838.42) 2579,2838.42 ; 3474.96,1636.03 cw(c3500.03,1610.96) 3500.03,1646.42 ccw(c3500.03,1610.96) 3474.96,1636.03 ; C18.2@3503.97,1646.42 cw(c3503.97,1610.96) 3529.04,1636.03 ccw(c3503.97,1610.96) C18.2@3503.97,1646.42 ; C18.2@3520.62,1663.07 ccw(c3565.58,1663.07) 3533.79,1631.28 cw(c3565.58,1663.07) C18.2@3520.62,1663.07 ; 3759.8,3127.46 cw(c3811.54,3127.46) 3774.95,3164.05 ccw(c3811.54,3127.46) 3759.8,3127.46 ; 3759.8,3151.61 cw(c3787.39,3151.61) 3767.88,3171.12 ccw(c3787.39,3151.61) 3759.8,3151.61 ; 4109.41,2935 ccw(c4109.41,2973.59) 4136.7,2946.3 cw(c4109.41,2973.59) 4109.41,2935 ; 4434.11,3085.11 ccw(c4375.22,3144) 4458.5,3144 cw(c4375.22,3144) 4434.11,3085.11 ; 4451.18,3102.18 ccw(c4409.37,3144) 4468.5,3144 cw(c4409.37,3144) 4451.18,3102.18 ; 4453.43,3104.43 cw(c4485,3072.85) 4485,3117.5 ccw(c4485,3072.85) 4453.43,3104.43 ; C1.2@4469.66,3120.66 ccw(c4448.32,3142) 4478.5,3142 cw(c4448.32,3142) C1.2@4469.66,3120.66 ; 5054.94,1766.06 ccw(c5119,1830.13) 5119,1739.53 cw(c5119,1830.13) 5054.94,1766.06 ; 5072.01,1748.99 ccw(c5119,1795.98) 5119,1729.53 cw(c5119,1795.98) 5072.01,1748.99 ; 5086.32,1734.68 cw(c5066.64,1715) 5094.47,1715 ccw(c5066.64,1715) 5086.32,1734.68 ; 5089.08,1731.92 ccw(c5119,1761.84) 5119,1719.53 cw(c5119,1761.84) 5089.08,1731.92
  Bottom Layer w10: P1.10@2282,2820 2350,2820 2381,2789 v1(2485,2789) ; v1@2536,1615 2565,1644 v1(2565,2247) ; UART1.5@3078,3935 3078,3754 P4.22@3437,3395 3663,3169 v2(3770,3169) ; 3406.48,3417.35 ccw(c3443.61,3427.3) P4.22@3435.9,3389.64 ; 3414.65,3425.52 cw(c3404.7,3388.39) P4.22@3442.36,3396.1 ; P4.22@3431.64,3393.9 ccw(c3469.3,3401.61) 3459.35,3364.48 ; P4.22@3438.1,3400.36 cw(c3430.39,3362.7) 3467.52,3372.65 ; v1(3948,2560) 3948,2798 3880,2866 3880,2994 3982,2994 4012,2964 ; v1(4012,2935) 4012,2964 ; v2(4193,2626) 4193,2617 4204,2606 ; P2.22@4462,2035 4488,2061 4488,2449 4331,2606 4204,2606 ; v1(4486,3142) 4614,3270 P3.22@4712,3270 4721,3279 4721,3606 4992,3877 ; v1@4486.06,3149.5 ccw(c4486.2,3167.12) 4498.81,3154.81 ; v1@4486.09,3149.5 ccw(c4486.29,3166.88) 4498.44,3154.44 ccw(c4510.88,3142.29) v1@4493.5,3142.09 ; v1@4493.5,3142.06 cw(c4511.12,3142.2) 4498.81,3154.81 ; UART0.5@4992,3926 4992,3877 ; UART1.P2.2@5333.64,1716.1 cw(c5371.3,1708.39) 5361.35,1745.52 ; UART1.P2.2@5339,1715 5402,1778 5402,2257 ; UART1.P2.2@5340.1,1709.64 ccw(c5332.39,1747.3) 5369.52,1737.35 ; LCD.24@5356.74,2295.5 ccw(c5396,2306.67) 5386.74,2266.91 ; LCD.24@5362,2297 5402,2257 ; LCD.24@5363.5,2302.26 cw(c5352.33,2263) 5392.09,2272.26 ; 2317.07,2820 cw(c2317.07,2855.07) 2292.27,2830.27 ccw(c2317.07,2855.07) 2317.07,2820 ; 2317.07,2820 ccw(c2317.07,2784.93) 2292.27,2809.73 cw(c2317.07,2784.93) 2317.07,2820 ; 2341.21,2820 cw(c2341.21,2879.21) 2299.34,2837.34 ccw(c2341.21,2879.21) 2341.21,2820 ; 2341.21,2820 ccw(c2341.21,2760.79) 2299.34,2802.66 cw(c2341.21,2760.79) 2341.21,2820 ; 2466.89,2789 cw(c2466.89,2770.89) 2479.7,2783.7 ccw(c2466.89,2770.89) 2466.89,2789 ; 2466.89,2789 ccw(c2466.89,2807.11) 2479.7,2794.3 cw(c2466.89,2807.11) 2466.89,2789 ; 2565,2228.89 cw(c2583.11,2228.89) 2570.3,2241.7 ccw(c2583.11,2228.89) 2565,2228.89 ; 2565,2228.89 ccw(c2546.89,2228.89) 2559.7,2241.7 cw(c2546.89,2228.89) 2565,2228.89 ; 3078,3862.57 cw(c3150.43,3862.57) 3099.21,3913.79 ccw(c3150.43,3862.57) 3078,3862.57 ; 3078,3862.57 ccw(c3005.57,3862.57) 3056.79,3913.79 cw(c3005.57,3862.57) 3078,3862.57 ; 3078,3886.72 cw(c3126.28,3886.72) 3092.14,3920.86 ccw(c3126.28,3886.72) 3078,3886.72 ; 3078,3886.72 ccw(c3029.72,3886.72) 3063.86,3920.86 cw(c3029.72,3886.72) 3078,3886.72 ; 3395.13,3436.87 cw(c3353.26,3395) 3412.47,3395 ccw(c3353.26,3395) 3395.13,3436.87 ; 3395.13,3436.87 ccw(c3437,3478.74) 3437,3419.53 cw(c3437,3478.74) 3395.13,3436.87 ; 3412.2,3419.8 cw(c3387.4,3395) 3422.47,3395 ccw(c3387.4,3395) 3412.2,3419.8 ; 3412.2,3419.8 ccw(c3437,3444.6) 3437,3409.53 cw(c3437,3444.6) 3412.2,3419.8 ; 3461.8,3370.2 cw(c3486.6,3395) 3451.53,3395 ccw(c3486.6,3395) 3461.8,3370.2 ; 3461.8,3370.2 ccw(c3437,3345.4) 3437,3380.47 cw(c3437,3345.4) 3461.8,3370.2 ; 3478.87,3353.13 cw(c3520.74,3395) 3461.53,3395 ccw(c3520.74,3395) 3478.87,3353.13 ; 3478.87,3353.13 ccw(c3437,3311.26) 3437,3370.47 cw(c3437,3311.26) 3478.87,3353.13 ; 3753.1,3169 cw(c3753.1,3152.1) 3765.05,3164.05 ccw(c3753.1,3152.1) 3753.1,3169 ; 3753.1,3169 ccw(c3753.1,3185.9) 3765.05,3173.95 cw(c3753.1,3185.9) 3753.1,3169 ; C3.2@3948,2578.11 cw(c3929.89,2578.11) 3942.7,2565.3 ccw(c3929.89,2578.11) C3.2@3948,2578.11 ; C3.2@3948,2578.11 ccw(c3966.11,2578.11) 3953.3,2565.3 cw(c3966.11,2578.11) C3.2@3948,2578.11 ; C6.2@4012,2953.11 cw(c3993.89,2953.11) 4006.7,2940.3 ccw(c3993.89,2953.11) C6.2@4012,2953.11 ; C6.2@4012,2953.11 ccw(c4030.11,2953.11) 4017.3,2940.3 cw(c4030.11,2953.11) C6.2@4012,2953.11 ; 4012,2964 cw(c3999.18,2964) 4004.29,2952.24 ccw(c3999.18,2964) 4012,2964 ; 4012,2964 ccw(c4026.58,2964) 4019.27,2951.38 cw(c4026.58,2964) 4012,2964 ; 4204,2606 cw(c4216.49,2618.49) 4199.67,2623.87 ccw(c4216.49,2618.49) 4204,2606 ; 4498.8,3154.8 cw(c4486,3167.61) 4486,3149.5 ccw(c4486,3167.61) 4498.8,3154.8 ; 4498.8,3154.8 ccw(c4511.61,3142) 4493.5,3142 cw(c4511.61,3142) 4498.8,3154.8 ; 4652.79,3270 cw(c4652.79,3210.79) 4694.66,3252.66 ccw(c4652.79,3210.79) 4652.79,3270 ; 4652.79,3270 ccw(c4652.79,3329.21) P3.22@4694.66,3287.34 ; 4652.79,3270 ccw(c4652.79,3329.21) P3.22@4694.66,3287.34 ; 4676.93,3270 cw(c4676.93,3234.93) 4701.73,3259.73 ccw(c4676.93,3234.93) 4676.93,3270 ; 4676.93,3270 ccw(c4676.93,3305.07) P3.22@4701.73,3280.27 ; 4676.93,3270 ccw(c4676.93,3305.07) P3.22@4701.73,3280.27 ; P3.22@4694.66,3287.34 ccw(c4631.06,3350.94) 4721,3350.94 cw(c4631.06,3350.94) P3.22@4694.66,3287.34 ; P3.22@4701.73,3280.27 ccw(c4655.2,3326.8) 4721,3326.8 cw(c4655.2,3326.8) P3.22@4701.73,3280.27 ; 4992,3877 cw(c5017.01,3877) 5005.64,3899.28 ccw(c5017.01,3877) 4992,3877 ; 4992,3877 ccw(c4966.99,3877) 4978.36,3899.28 cw(c4966.99,3877) 4992,3877 ; 5363.8,1739.8 cw(c5339,1764.6) 5339,1729.53 ccw(c5339,1764.6) 5363.8,1739.8 ; 5363.8,1739.8 ccw(c5388.6,1715) 5353.53,1715 cw(c5388.6,1715) 5363.8,1739.8 ; 5380.87,1756.87 cw(c5339,1798.74) 5339,1739.53 ccw(c5339,1798.74) 5380.87,1756.87 ; 5380.87,1756.87 ccw(c5422.74,1715) 5363.53,1715 cw(c5422.74,1715) 5380.87,1756.87 ; 5385.69,2273.31 cw(c5407.87,2295.49) 5376.52,2296.52 ccw(c5407.87,2295.49) 5385.69,2273.31 ; 5385.69,2273.31 ccw(c5363.51,2251.13) 5362.48,2282.48 cw(c5363.51,2251.13) 5385.69,2273.31 ; 5402,2257 cw(c5439.45,2294.45) 5386.51,2296.19 ccw(c5439.45,2294.45) 5402,2257 ; 5402,2257 ccw(c5364.55,2219.55) 5362.81,2272.49 cw(c5364.55,2219.55) 5402,2257 ; v1@2539,1630.5 ccw(c2539,1660.68) 2560.34,1639.34 cw(c2539,1660.68) v1@2539,1630.5 ; C3.2@3936.3,2575.74 ccw(c3908.04,2604) 3948,2604 cw(c3908.04,2604) C3.2@3936.3,2575.74 ; 3948,2604.34 ccw(c3988.45,2604.34) 3959.85,2575.74 cw(c3988.45,2604.34) 3948,2604.34 ; P3.22@4708.8,3273.2 ccw(c4679.34,3302.66) 4721,3302.66 cw(c4679.34,3302.66) P3.22@4708.8,3273.2 ; 4721,3307.49 ccw(c4749.49,3307.49) 4729.34,3287.34 cw(c4749.49,3307.49) 4721,3307.49
  other v1: 2539,1623
LED1: LED_P1.1 R13.2 | length 1274.5
  Top Layer w10: R13.2@3951.98,1745.24 3951.98,1802.98 4025,1876 LED_P1.1@4716,1876 ; 3951.98,1785.45 cw(c3911.78,1785.45) 3940.21,1757.02 ccw(c3911.78,1785.45) 3951.98,1785.45 ; 3951.98,1785.45 ccw(c3992.19,1785.45) 3963.76,1757.02 cw(c3992.19,1785.45) 3951.98,1785.45 ; 4656.79,1876 cw(c4656.79,1816.79) 4698.66,1858.66 ccw(c4656.79,1816.79) 4656.79,1876 ; 4656.79,1876 ccw(c4656.79,1935.21) 4698.66,1893.34 cw(c4656.79,1935.21) 4656.79,1876 ; 4680.93,1876 cw(c4680.93,1840.93) 4705.73,1865.73 ccw(c4680.93,1840.93) 4680.93,1876 ; 4680.93,1876 ccw(c4680.93,1911.07) 4705.73,1886.27 cw(c4680.93,1911.07) 4680.93,1876
LED2: LED_P1.3 R14.2 | length 1254.7
  Top Layer w10: R14.2@4051.98,1745.24 4051.98,1788.98 4093,1830 4662,1830 LED_P1.3@4716,1776 ; 4685.48,1798.35 ccw(c4722.61,1808.3) LED_P1.3@4714.9,1770.64 ; 4693.65,1806.52 cw(c4683.7,1769.39) LED_P1.3@4721.36,1777.1 ; 4051.98,1785.45 cw(c4011.78,1785.45) 4040.21,1757.02 ccw(c4011.78,1785.45) 4051.98,1785.45 ; 4051.98,1785.45 ccw(c4092.19,1785.45) 4063.76,1757.02 cw(c4092.19,1785.45) 4051.98,1785.45 ; 4674.13,1817.87 cw(c4632.26,1776) 4691.47,1776 ccw(c4632.26,1776) 4674.13,1817.87 ; 4674.13,1817.87 ccw(c4716,1859.74) 4716,1800.53 cw(c4716,1859.74) 4674.13,1817.87 ; 4691.2,1800.8 cw(c4666.4,1776) 4701.47,1776 ccw(c4666.4,1776) 4691.2,1800.8 ; 4691.2,1800.8 ccw(c4716,1825.6) 4716,1790.53 cw(c4716,1825.6) 4691.2,1800.8
LED3: LED_P1.5 R15.2 | length 1172.2
  Top Layer w10: R15.2@4151.98,1745.24 4202.74,1796 4596,1796 LED_P1.5@4716,1676 ; R15.2@4154.75,1742 ccw(c4148.04,1769.16) R15.2@4175.07,1761.92 ; 4685.48,1698.35 ccw(c4722.61,1708.3) LED_P1.5@4714.9,1670.64 ; 4693.65,1706.52 cw(c4683.7,1669.39) LED_P1.5@4721.36,1677.1 ; 4674.13,1717.87 cw(c4632.26,1676) 4691.47,1676 ccw(c4632.26,1676) 4674.13,1717.87 ; 4674.13,1717.87 ccw(c4716,1759.74) 4716,1700.53 cw(c4716,1759.74) 4674.13,1717.87 ; 4691.2,1700.8 cw(c4666.4,1676) 4701.47,1676 ccw(c4666.4,1676) 4691.2,1700.8 ; 4691.2,1700.8 ccw(c4716,1725.6) 4716,1690.53 cw(c4716,1725.6) 4691.2,1700.8 ; R15.2@4153.95,1761.9 ccw(c4153.95,1797.35) 4179.02,1772.28 cw(c4153.95,1797.35) R15.2@4153.95,1761.9 ; R15.2@4170.6,1745.24 cw(c4215.56,1745.24) 4183.77,1777.03 ccw(c4215.56,1745.24) R15.2@4170.6,1745.24
LED4: LED_P1.7 R16.2 | length 1041.7
  Top Layer w10: R16.2@4251.98,1745.24 4546.76,1745.24 LED_P1.7@4716,1576 ; 4685.48,1598.35 ccw(c4722.61,1608.3) LED_P1.7@4714.9,1570.64 ; 4693.65,1606.52 cw(c4683.7,1569.39) LED_P1.7@4721.36,1577.1 ; 4294.16,1745.24 cw(c4294.16,1785.45) 4265.73,1757.02 ccw(c4294.16,1785.45) 4294.16,1745.24 ; 4294.16,1745.24 ccw(c4294.16,1705.04) 4265.73,1733.47 cw(c4294.16,1705.04) 4294.16,1745.24 ; 4674.13,1617.87 cw(c4632.26,1576) 4691.47,1576 ccw(c4632.26,1576) 4674.13,1617.87 ; 4674.13,1617.87 ccw(c4716,1659.74) 4716,1600.53 cw(c4716,1659.74) 4674.13,1617.87 ; 4691.2,1600.8 cw(c4666.4,1576) 4701.47,1576 ccw(c4666.4,1576) 4691.2,1600.8 ; 4691.2,1600.8 ccw(c4716,1625.6) 4716,1590.53 cw(c4716,1625.6) 4691.2,1600.8
NetC20_1: C20.1 U4.3 | length 414.3
  Top Layer w10: C20.1@3643,3896 3652,3905 3663,3905 3698,3870 ; C20.1@3650.32,3898.96 ccw(c3687.43,3927.54) 3681.4,3881.09 ; U4.3@3791.64,3870 3698,3870 ; 3698,3870 ccw(c3661.93,3833.93) 3655.17,3884.49 cw(c3661.93,3833.93) 3698,3870 ; 3743.7,3870 cw(c3743.7,3853.56) 3755.33,3865.18 ccw(c3743.7,3853.56) 3743.7,3870 ; 3743.7,3870 ccw(c3743.7,3886.44) 3755.33,3874.82 cw(c3743.7,3886.44) 3743.7,3870 ; C20.1@3653.85,3894.41 cw(c3658.56,3859.17) 3683.69,3884.31 ccw(c3658.56,3859.17) C20.1@3653.85,3894.41
NetC20_2: C20.2 U4.1 | length 325.3
  Top Layer w10: C20.2@3646,3965.93 3650.07,3970 U4.1@3791.64,3970 ; 3743.7,3970 cw(c3743.7,3953.56) 3755.33,3965.18 ccw(c3743.7,3953.56) 3743.7,3970 ; 3743.7,3970 ccw(c3743.7,3986.44) 3755.33,3974.82 cw(c3743.7,3986.44) 3743.7,3970 ; C20.2@3664.74,3956.15 cw(c3698.17,3922.72) 3698.17,3970 ccw(c3698.17,3922.72) C20.2@3664.74,3956.15 ; C20.2@3664.74,3979.7 ccw(c3688.17,4003.13) 3688.17,3970 cw(c3688.17,4003.13) C20.2@3664.74,3979.7
NetC21_1: C21.1 U4.5 | length 660.4
  Top Layer w10: C21.1@3648.46,3751.79 ccw(c3662.54,3764.22) C21.1@3672.46,3748.26 ; C21.1@3649,3754 3665,3770 U4.5@3791.64,3770 ; C21.1@3655.96,3758.4 ccw(c3671.53,3772.15) 3682.5,3754.51 ; C21.1@3661.09,3767.23 ccw(c3673.74,3783.77) 3684.15,3765.74 ; C21.1@3663.45,3765.02 ccw(c3680.53,3780.09) 3692.55,3760.75 ; C21.1@3667.05,3749.69 cw(c3684.7,3744.96) 3675.56,3760.78 ; 3743.7,3770 cw(c3743.7,3753.56) 3755.33,3765.18 ccw(c3743.7,3753.56) 3743.7,3770 ; 3743.7,3770 ccw(c3743.7,3786.44) 3755.33,3774.82 cw(c3743.7,3786.44) 3743.7,3770 ; C21.1@3648.6,3756.37 cw(c3681.52,3723.45) 3681.52,3770 ccw(c3681.52,3723.45) C21.1@3648.6,3756.37 ; C21.1@3655.67,3749.3 cw(c3705.66,3699.31) 3705.66,3770 ccw(c3705.66,3699.31) C21.1@3655.67,3749.3 ; C21.1@3662.74,3742.22 cw(c3729.8,3675.17) 3729.8,3770 ccw(c3729.8,3675.17) C21.1@3662.74,3742.22
NetC21_2: C21.2 U4.4 | length 321
  Top Layer w10: C21.2@3649,3820.93 3649.93,3820 U4.4@3791.64,3820 ; 3743.7,3820 cw(c3743.7,3803.56) 3755.33,3815.18 ccw(c3743.7,3803.56) 3743.7,3820 ; 3743.7,3820 ccw(c3743.7,3836.44) 3755.33,3824.82 cw(c3743.7,3836.44) 3743.7,3820 ; C21.2@3662.74,3809.15 cw(c3688.93,3782.97) 3688.93,3820 ccw(c3688.93,3782.97) C21.2@3662.74,3809.15 ; C21.2@3662.74,3832.7 ccw(c3693.42,3863.38) 3693.42,3820 cw(c3693.42,3863.38) C21.2@3662.74,3832.7
NetC22_1: C22.1 U4.6 | length 1083
  Top Layer w10: U4.6@3791.64,3720 3732,3720 3705,3693 3612,3693 3545,3760 3545,3982 3761,4198 C22.1@3853,4198 ; 3743.7,3720 cw(c3743.7,3703.56) 3755.33,3715.18 ccw(c3743.7,3703.56) 3743.7,3720 ; 3743.7,3720 ccw(c3743.7,3736.44) 3755.33,3724.82 cw(c3743.7,3736.44) 3743.7,3720 ; 3812.79,4198 cw(c3812.79,4157.79) 3841.22,4186.22 ccw(c3812.79,4157.79) 3812.79,4198 ; 3812.79,4198 ccw(c3812.79,4238.21) 3841.22,4209.78 cw(c3812.79,4238.21) 3812.79,4198
NetC23_1: C23.1 U4.2 | length 406.2
  Top Layer w10: U4.2@3791.64,3920 3852,3920 3859,3927 C23.1@3859,4085 ; 3839.58,3920 cw(c3839.58,3936.44) 3827.95,3924.82 ccw(c3839.58,3936.44) 3839.58,3920 ; 3839.58,3920 ccw(c3839.58,3903.56) 3827.95,3915.18 cw(c3839.58,3903.56) 3839.58,3920 ; 3859,4042.83 cw(c3899.21,4042.83) 3870.78,4071.26 ccw(c3899.21,4042.83) 3859,4042.83 ; 3859,4042.83 ccw(c3818.79,4042.83) 3847.22,4071.26 cw(c3818.79,4042.83) 3859,4042.83
NetCON0_2: U4.14 UART0.2 | length 1801.4
  Top Layer w10: U4.14@3996.36,3870 4456,3870 4496,3830 4602,3830 ; 4625.17,3861.6 cw(c4722.82,3845.72) UART0.2@4665,3926 ; 4629.04,3885.43 cw(c4702.87,3873.42) UART0.2@4659.16,3934.11 ; 4632.92,3909.26 cw(c4682.91,3901.13) UART0.2@4653.31,3942.23 ; 4638.78,3885.15 cw(c4698.96,3875.36) UART0.2@4665,3926 ; UART0.2@4640.66,3908.47 cw(c4608.65,3885.42) 4647.58,3879.08 ; 4649.63,3891.7 cw(c4682.58,3886.34) UART0.2@4669.05,3916.86 ; 4044.3,3870 cw(c4044.3,3886.44) 4032.67,3874.82 ccw(c4044.3,3886.44) 4044.3,3870 ; 4044.3,3870 ccw(c4044.3,3853.56) 4032.67,3865.18 cw(c4044.3,3853.56) 4044.3,3870 ; 4602,3830 ccw(c4520.58,3911.43) 4635.15,3922.99 cw(c4520.58,3911.43) 4602,3830 ; 4602,3830 4665,3893 UART0.2@4665,3926 ; UART0.2@4665,3926 cw(c4601.81,3919.63) 4646.72,3874.72 ccw(c4601.81,3919.63) UART0.2@4665,3926 ; 4616.91,3844.91 ccw(c4547.66,3914.16) 4645.1,3923.99 cw(c4547.66,3914.16) 4616.91,3844.91 ; 4631.81,3859.81 ccw(c4574.73,3916.89) 4655.05,3925 cw(c4574.73,3916.89) 4631.81,3859.81 ; 4661.62,3889.62 ccw(c4628.89,3922.36) 4674.95,3927 cw(c4628.89,3922.36) 4661.62,3889.62
NetCON0_3: U4.13 UART0.3 | length 1602.1
  Top Layer w10: U4.13@3996.36,3820 4121,3820 4171,3770 4630,3770 4774,3914 UART0.3@4774,3926 ; 4731.97,3881.09 cw(c4795.03,3864.19) UART0.3@4774,3926 ; 4736.81,3899.17 cw(c4787.77,3885.52) UART0.3@4770.78,3935.47 ; 4743.24,3885.85 cw(c4783.73,3875) UART0.3@4775.87,3916.18 ; 4747.37,3901.25 cw(c4780.41,3892.4) UART0.3@4774,3926 ; 4756.5,3891.31 ccw(c4746.88,3927.19) UART0.3@4783.99,3925.56 ; 4044.3,3820 cw(c4044.3,3836.44) 4032.67,3824.82 ccw(c4044.3,3836.44) 4044.3,3820 ; 4044.3,3820 ccw(c4044.3,3803.56) 4032.67,3815.18 cw(c4044.3,3803.56) 4044.3,3820 ; 4714.3,3854.3 ccw(c4642.6,3926) 4744,3926 cw(c4642.6,3926) 4714.3,3854.3 ; 4731.37,3871.37 ccw(c4676.75,3926) 4754,3926 cw(c4676.75,3926) 4731.37,3871.37 ; 4743.27,3883.27 cw(c4774,3852.54) 4774,3896 ccw(c4774,3852.54) 4743.27,3883.27 ; 4748.44,3888.44 ccw(c4710.89,3926) 4764,3926 cw(c4710.89,3926) 4748.44,3888.44
NetCON1_2: U4.7 UART1.2 | length 1794.4
  Top Layer w10: UART1.2@2751,3935 2751,4074 2771,4094 3086,4094 3510,3670 U4.7@3791.64,3670 ; 2751,3983.28 cw(c2702.72,3983.28) 2736.86,3949.14 ccw(c2702.72,3983.28) 2751,3983.28 ; 2751,3983.28 ccw(c2799.28,3983.28) 2765.14,3949.14 cw(c2799.28,3983.28) 2751,3983.28 ; 2751,4007.43 cw(c2678.57,4007.43) 2729.79,3956.21 ccw(c2678.57,4007.43) 2751,4007.43 ; 2751,4007.43 ccw(c2823.43,4007.43) 2772.21,3956.21 cw(c2823.43,4007.43) 2751,4007.43 ; 3743.7,3670 cw(c3743.7,3653.56) 3755.33,3665.18 ccw(c3743.7,3653.56) 3743.7,3670 ; 3743.7,3670 ccw(c3743.7,3686.44) 3755.33,3674.82 cw(c3743.7,3686.44) 3743.7,3670
NetCON1_3: U4.8 UART1.3 | length 1604.9
  Top Layer w10: UART1.3@2860,3935 2860,3744 2984,3620 U4.8@3791.64,3620 ; 2860,3862.57 cw(c2932.43,3862.57) 2881.21,3913.79 ccw(c2932.43,3862.57) 2860,3862.57 ; 2860,3862.57 ccw(c2787.57,3862.57) 2838.79,3913.79 cw(c2787.57,3862.57) 2860,3862.57 ; 2860,3886.72 cw(c2908.28,3886.72) 2874.14,3920.86 ccw(c2908.28,3886.72) 2860,3886.72 ; 2860,3886.72 ccw(c2811.72,3886.72) 2845.86,3920.86 cw(c2811.72,3886.72) 2860,3886.72 ; 3743.7,3620 cw(c3743.7,3603.56) 3755.33,3615.18 ccw(c3743.7,3603.56) 3743.7,3620 ; 3743.7,3620 ccw(c3743.7,3636.44) 3755.33,3624.82 cw(c3743.7,3636.44) 3743.7,3620
NetLED1_2: LED1.2 R13.1 | length 294.4
  Top Layer w10: LED1.2@3951.98,1591.78 R13.1@3951.98,1678.32 ; 3951.98,1617.73 cw(c3926.03,1617.73) 3944.38,1599.38 ccw(c3926.03,1617.73) 3951.98,1617.73 ; 3951.98,1617.73 ccw(c3977.93,1617.73) 3959.58,1599.38 cw(c3977.93,1617.73) 3951.98,1617.73 ; 3951.98,1638.11 cw(c3992.19,1638.11) 3963.76,1666.54 ccw(c3992.19,1638.11) 3951.98,1638.11 ; 3951.98,1638.11 ccw(c3911.78,1638.11) 3940.21,1666.54 cw(c3911.78,1638.11) 3951.98,1638.11
NetLED2_2: LED2.2 R14.1 | length 291
  Top Layer w10: LED2.2@4048.65,1591.78 R14.1@4048.65,1674.98 ; 4048.65,1617.73 cw(c4022.7,1617.73) 4041.05,1599.38 ccw(c4022.7,1617.73) 4048.65,1617.73 ; 4048.65,1617.73 ccw(c4074.6,1617.73) 4056.25,1599.38 cw(c4074.6,1617.73) 4048.65,1617.73 ; R14.1@4038.24,1666.54 cw(c4013.1,1641.41) 4048.65,1641.41 ccw(c4013.1,1641.41) R14.1@4038.24,1666.54 ; 4048.65,1634.81 cw(c4093.51,1634.81) 4061.79,1666.54 ccw(c4093.51,1634.81) 4048.65,1634.81
NetLED3_2: LED3.2 R15.1 | length 338.1
  Top Layer w10: LED3.2@4145.31,1591.78 R15.1@4145.31,1671.65 ; 4145.32,1617.73 cw(c4119.37,1617.73) 4137.72,1599.38 ccw(c4119.37,1617.73) 4145.32,1617.73 ; 4145.31,1617.73 ccw(c4171.26,1617.73) 4152.91,1599.38 cw(c4171.26,1617.73) 4145.31,1617.73 ; R15.1@4138.24,1666.54 cw(c4121.15,1649.45) 4145.31,1649.45 ccw(c4121.15,1649.45) R15.1@4138.24,1666.54 ; 4145.31,1626.77 cw(c4201.56,1626.77) 4161.79,1666.54 ccw(c4201.56,1626.77) 4145.31,1626.77 ; 4145.31,1650.91 cw(c4177.42,1650.91) 4154.72,1673.61 ccw(c4177.42,1650.91) 4145.31,1650.91
NetLED4_2: LED4.2 R16.1 | length 352.7
  Top Layer w10: LED4.2@4241.98,1591.78 R16.1@4241.98,1668.31 ; 4241.98,1617.73 cw(c4216.03,1617.73) 4234.38,1599.38 ccw(c4216.03,1617.73) 4241.98,1617.73 ; 4241.98,1617.73 ccw(c4267.93,1617.73) 4249.58,1599.38 cw(c4267.93,1617.73) 4241.98,1617.73 ; R16.1@4238.24,1666.54 cw(c4229.2,1657.5) 4241.98,1657.5 ccw(c4229.2,1657.5) R16.1@4238.24,1666.54 ; 4241.98,1618.72 cw(c4309.61,1618.72) 4261.79,1666.54 ccw(c4309.61,1618.72) 4241.98,1618.72 ; 4241.98,1642.86 cw(c4285.47,1642.86) 4254.72,1673.61 ccw(c4285.47,1642.86) 4241.98,1642.86